# Altium PCB PCB1.PcbDoc
Units mm, origin at the board's own origin, x right, y up, seen from the top; angles counter-clockwise.
Board outline 18.75 x 45.47 mm, 4 copper layers (Top Layer, signal 1, signal2, Bottom Layer), stack 0.603 mm thick; 25 components, 40 nets, 147 pads, 32 vias.
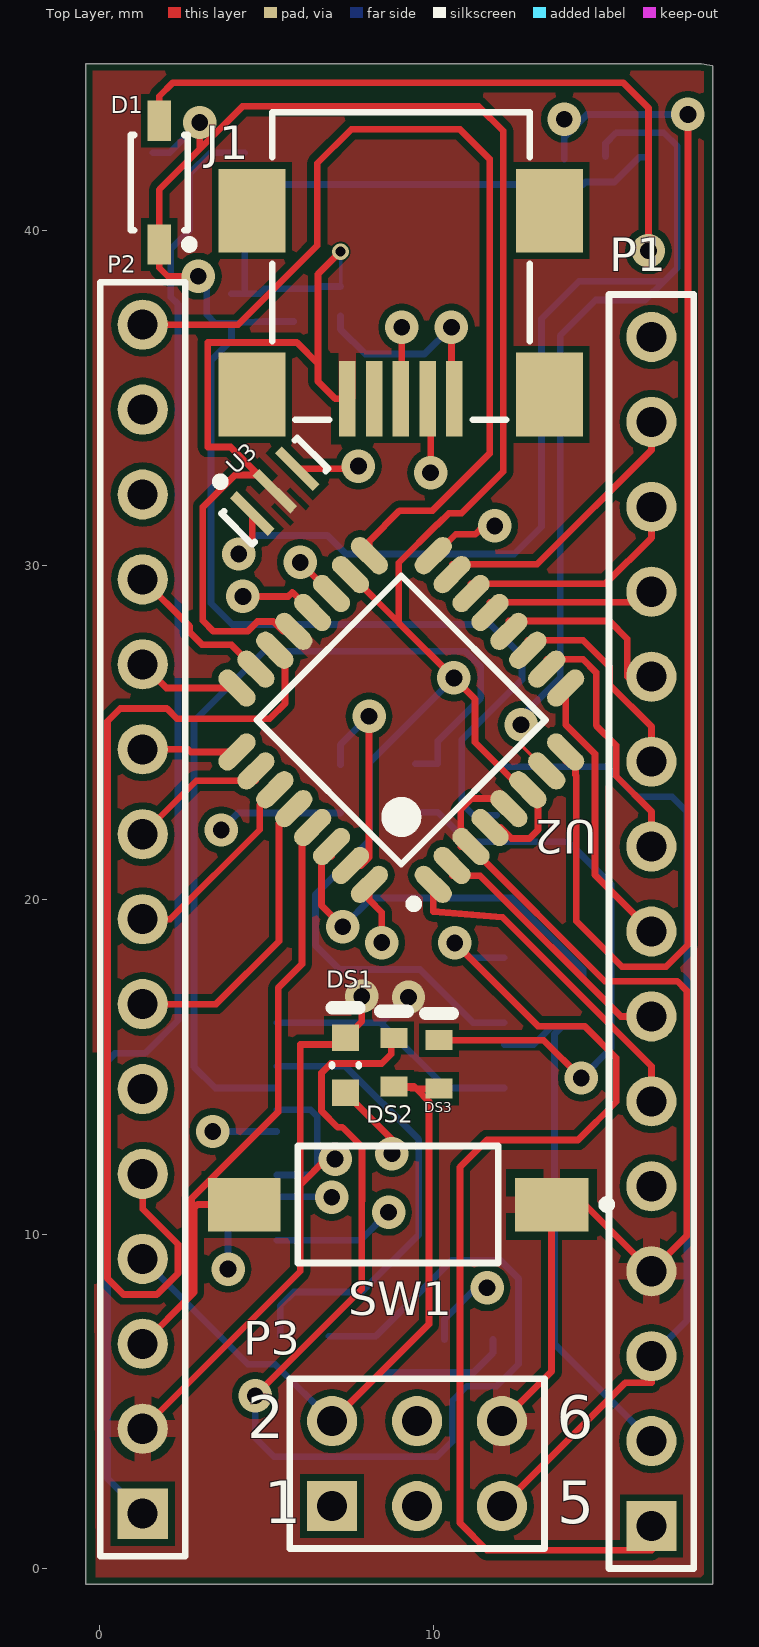
[diagram p0: Top Layer view]
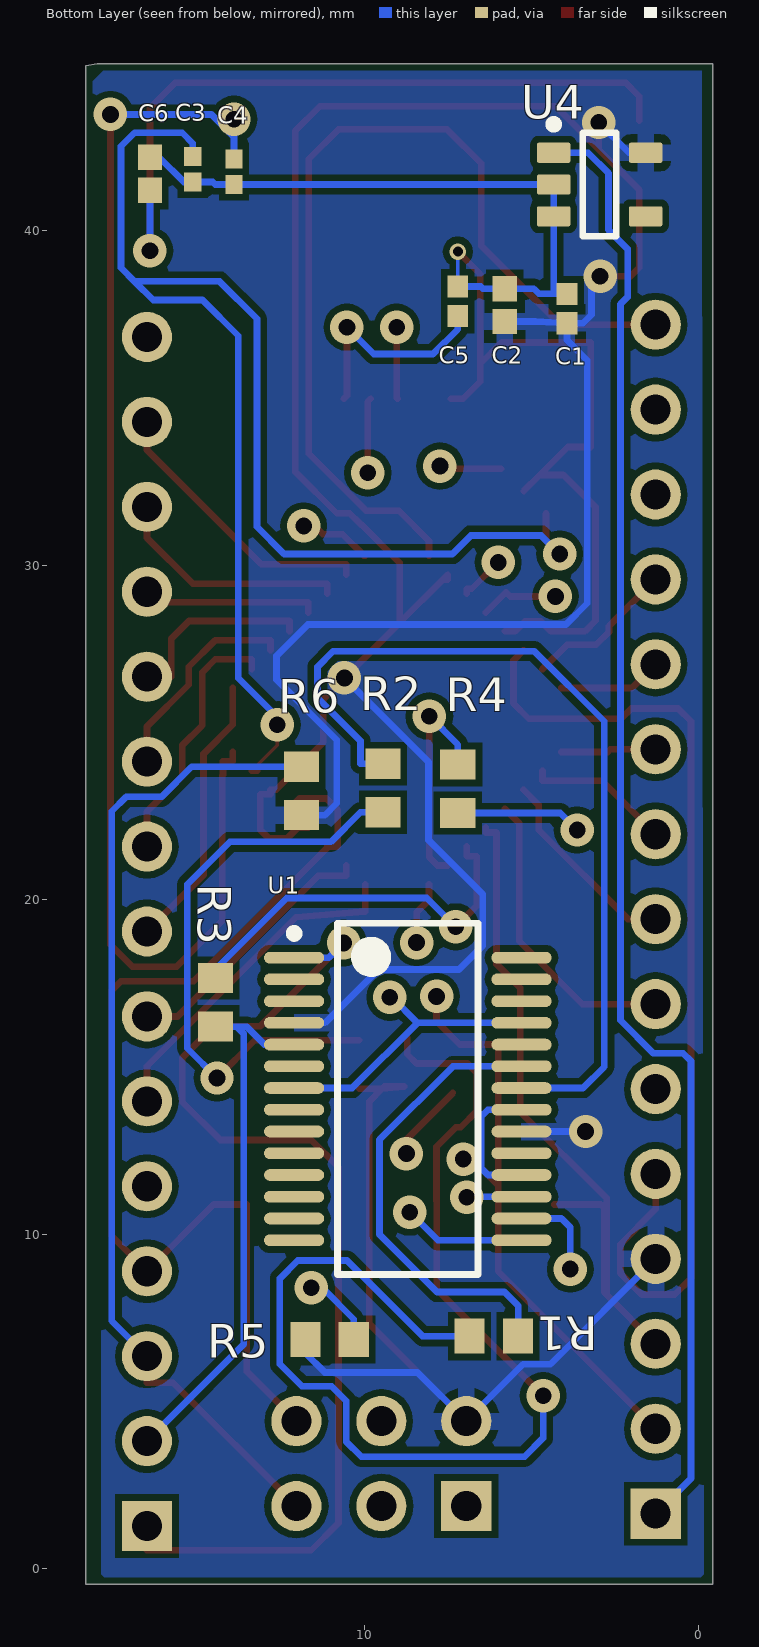
[diagram p1: Bottom Layer view, seen from below]
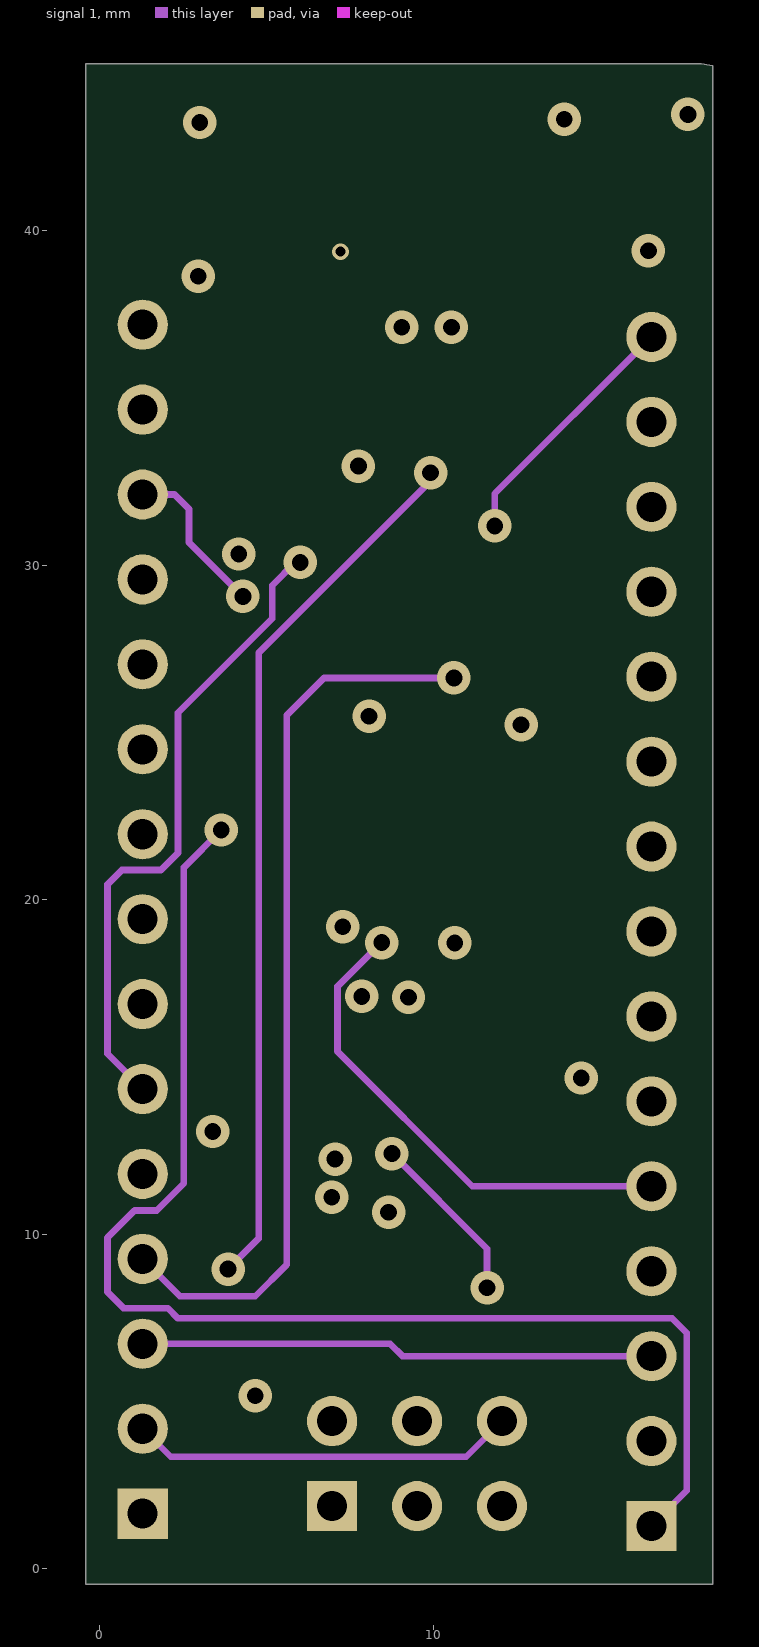
[diagram p2: signal 1]
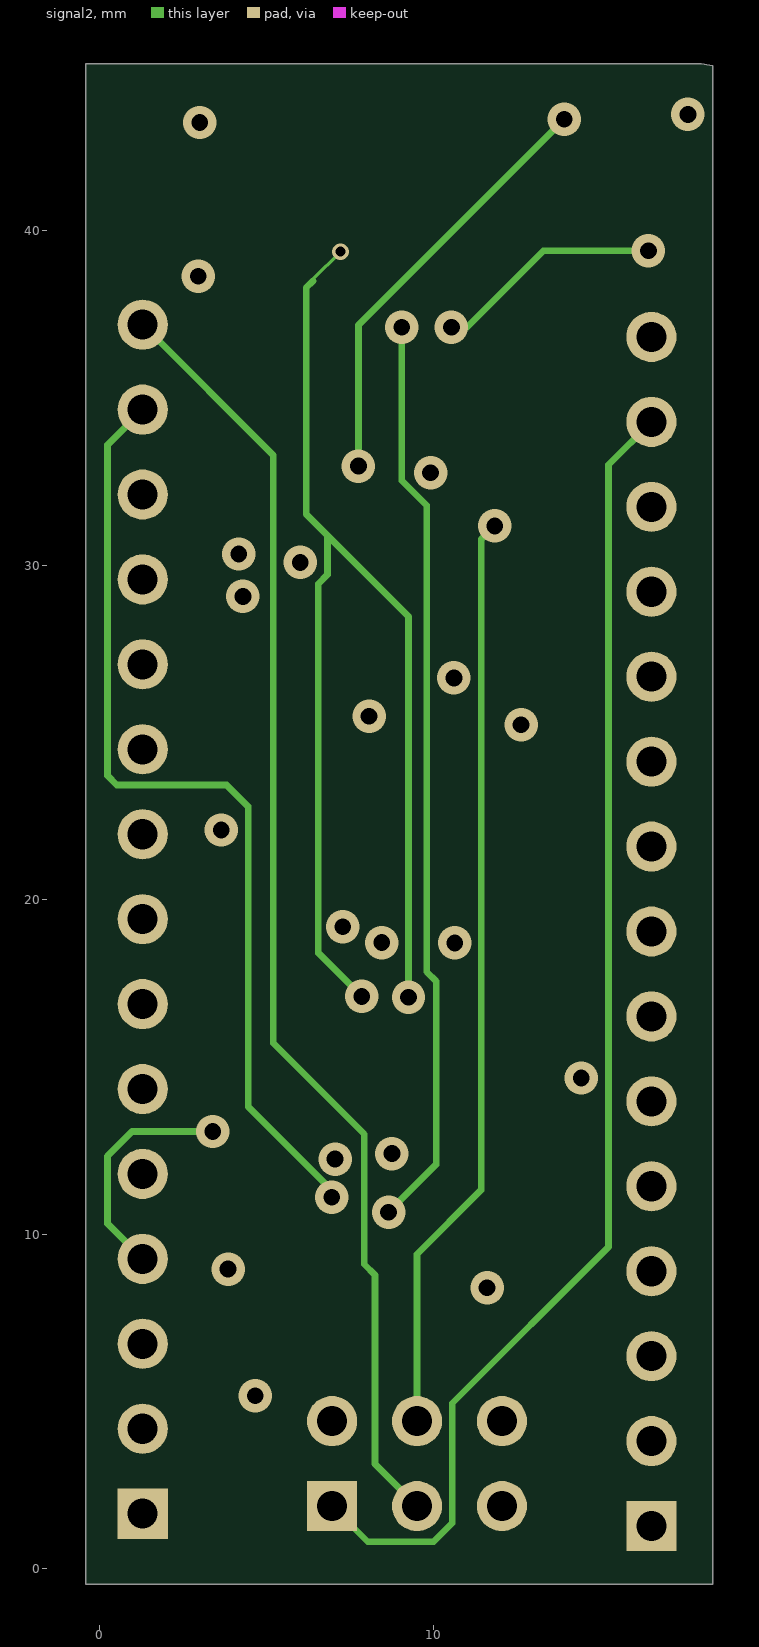
[diagram p3: signal2]

## Layer stack, top to bottom
Top Solder: solder mask 0.0102, Solder Resist, Dk 3.5
Top Layer: signal copper 0.0356
Dielectric 2: prepreg 0.0711, FR-4, Dk 4.1
signal 1: signal copper 0.035
Dielectric 1: dielectric 0.32, FR-4, Dk 4.8
signal2: signal copper 0.035
Dielectric 3: prepreg 0.0711, FR-4, Dk 4.1
Bottom Layer: signal copper 0.0356
Bottom Solder: solder mask 0.0102, Solder Resist, Dk 3.5

## Board outline
-0.406,-0.467 -0.406,45 18,45 18.339,44.938 18.339,-0.471

## Design rules (kind name [scope] priority, off if disabled: settings)
BoardOutlineClearance [All] p1: gap=0.2 ignorepadtopadclearanceinfootprint=FALSE except(0.4: Arc-SplitBarrior Arc-SplitContinuation Track-SplitBarrior Track-SplitContinuation SMDPad-SplitBarrior SMDPad-SplitContinuation THPad-SplitBarrior THPad-SplitContinuation Via-SplitBarrior Via-SplitContinuation Fill-SplitBarrior Fill-SplitContinuation Poly-SplitBarrior Poly-SplitContinuation Region-SplitBarrior Region-SplitContinuation Text-SplitBarrior Text-SplitContinuation)
Clearance "Clearance Bottom Layer" [OnLayer('Bottom Layer')] p1: gap=0.203 ignorepadtopadclearanceinfootprint=TRUE except(0.254: Arc-Text Track-Text SMDPad-Text THPad-Text Via-Text Fill-Text Poly-Text Region-Text Text-Text)
Clearance "Clearance Top Layer" [OnLayer('Top Layer')] p2: gap=0.203 ignorepadtopadclearanceinfootprint=TRUE except(0.254: Arc-Text Track-Text SMDPad-Text THPad-Text Via-Text Fill-Text Poly-Text Region-Text Text-Text)
Clearance [All] p3: gap=0.2 ignorepadtopadclearanceinfootprint=FALSE except(0.089: Arc-Arc Arc-Track Arc-SMDPad Track-Track Track-SMDPad SMDPad-SMDPad; 0.127: Arc-Via Track-Via SMDPad-Via THPad-Via Via-Via; 0.254: Arc-Text Track-Text SMDPad-Text THPad-Text Via-Text Fill-Text Poly-Text Region-Text Text-Text)
HoleSize [All] p1: absolutevalues=TRUE maxlimit=6.3 minlimit=0.2 maxpercent=80.000 minpercent=20.000
MinimumAnnularRing [All] p1: minimumring=0.1
MinimumSolderMaskSliver [All] p1: minsoldermaskwidth=0.1
PolygonConnect PolygonConnect_1 [All] p1: thpad.connectstyle=Relief thpad.reliefconductorwidth=0.508 thpad.reliefentries=4 thpad.polygonreliefangle="90 Angle" thpad.airgapwidth=0.254 smdpad.connectstyle=Relief smdpad.reliefconductorwidth=0.508 smdpad.reliefentries=4 smdpad.polygonreliefangle="90 Angle" smdpad.airgapwidth=0.254 via.connectstyle=Direct via.reliefconductorwidth=0.508 via.reliefentries=4 via.polygonreliefangle="90 Angle" via.airgapwidth=0.254
RoutingCorners [All] p1: cornerstyle=Round minsetback=2.54 maxsetback=2.54
RoutingVias [All] p1: holewidth=0.5 width=1 viastyle="Through Hole" minholewidth=0.2 minwidth=0.45 maxholewidth=1 maxwidth=2
SilkToSilkClearance [All] p1: silktosilkclearance=0.1
SilkToSolderMaskClearance [IsPad] p1: minsilkscreentomaskgap=0.1 clearancetoexposedcopper=TRUE
SolderMaskExpansion [All] p1: expansion=0.1
Width [All] p1: maxlimit=0.5 minlimit=0.1 preferedwidth=0.2 minimp=50.000000 maximp=50.000000 favimp=50.000000
25 further rules are at their usual default settings.

## Components (designator, comment, footprint, x,y, rotation, side; value= is the part's Value field where it differs from the comment)
C1 "4.7uF" CAPC1005X55X25NL05T10 3.95,37.681 r270 bottom
C2 "0.1uF" CAPC1005X55X25ML05T10 5.809,37.782 r270 bottom
C3 "18pF" CAPC1005X55X30LL05T10 15.138,41.846 r270 bottom
C4 "18pF" CAPC1005X55X30LL05T10 13.906,41.769 r270 bottom
C5 "4.7uF" CAPC1005X55X25NL05T10 7.214,37.9 r270 bottom
C6 "0.1uF" CAPC1005X55X25ML05T10 16.421,41.712 r270 bottom
D1 "1N5819HW-7-F" DIOD-SOD-123-2_V 1.791,41.448 r270 top
DS1 "APT1608SGC" KING-APT1608SGC_V 7.36,15.05 r90 top
DS2 "TLMS1000-GS08" VISH-TLMS1000_V 8.814,15.139 r90 top
DS3 "TLMS1000-GS08" VISH-TLMS1000_V 10.16,15.074 r90 top
J1 "651305142821" 651305142821 9.017,38.951 r180 top
P1 "Header 15" HDR1X15 16.51,1.27 r90 top
P2 "Header 15" HDR1X15 1.295,1.638 r90 top
P3 "Header 3X2" HDR2X3 6.96,1.867 r0 top
R1 "330" RESC1608X55X30ML15T15 6.134,6.947 r0 bottom
R2 "330" RESC1608X55X30ML15T15 9.449,23.342 r270 bottom
R3 "1k" RESC1608X55X30ML15T15 14.463,16.929 r270 bottom
R4 "1k" RESC1608X55X30ML15T15 7.214,23.316 r270 bottom
R5 "330" RESC1608X55X30ML15T15 11.049,6.845 r180 bottom
R6 "1k" RESC1608X55X30ML15T15 11.887,23.253 r270 bottom
SW1 "FSMSM" TECO-FSMSM-2_V 8.928,10.884 r180 top
U1 "FT232RL-Reel" SSOP-28_L 8.709,14.042 r180 bottom
U2 "ATmega328-AU" 32A_L 9.03,25.375 r135 top
U3 "CSTCE16M0V53-R0" MURA-CSTCE_V-3_V 5.245,32.22 r45 top
U4 "TPS76150DBVT" DBV0005A_N 2.972,41.389 r180 bottom

## Footprints (in the part's own frame and the unit in brackets; to place one, negate y for a bottom-side part, rotate by r counter-clockwise, add the part's x,y. Pads: shape width x height; smd on the part's side, far side on the other; paste and mask are expansions set on the pad)
32A_L [mm] "Thin QFP, 32-Leads, Body 7x7mm, Pitch 0.8mm, IPC High Density"
  oval 1.35x0.55 smd: 1(-4.15,2.8) 2(-4.15,2) 3(-4.15,1.2) 4(-4.15,0.4) 5(-4.15,-0.4) 6(-4.15,-1.2) 7(-4.15,-2) 8(-4.15,-2.8) 17(4.15,-2.8) 18(4.15,-2) 19(4.15,-1.2) 20(4.15,-0.4) 21(4.15,0.4) 22(4.15,1.2) 23(4.15,2) 24(4.15,2.8)
  oval 0.55x1.35 smd: 9(-2.8,-4.15) 10(-2,-4.15) 11(-1.2,-4.15) 12(-0.4,-4.15) 13(0.4,-4.15) 14(1.2,-4.15) 15(2,-4.15) 16(2.8,-4.15) 25(2.8,4.15) 26(2,4.15) 27(1.2,4.15) 28(0.4,4.15) 29(-0.4,4.15) 30(-1.2,4.15) 31(-2,4.15) 32(-2.8,4.15)
  silkscreen extent -4.27,-3.05 3.05,3.75, body extent -3.5,-3.5 3.5,3.5, height 1.2
651305142821 [mm] "Mini USB 2.0 Type AB SMT Horizontal 5 Contacts"
  rect 0.5x2.25 smd: 1(-1.6,3.965) 2(-0.8,3.965) 3(0,3.965) 4(0.8,3.965) 5(1.6,3.965)
  rect 2x2.5 smd: Shell(-4.45,3.84) Shell(-4.45,-1.66) Shell(4.45,3.84) Shell(4.45,-1.66)
  silkscreen extent -3.85,-4.6 3.85,4.6, body extent -4.95,-4.6 4.95,4.8, height 4.1
CAPC1005X55X25ML05T10 [mm] "Chip Capacitor, 2-Leads, Body 1.00x0.50mm, IPC Low Density"
  rect 0.76x0.72 smd: 1(-0.49,0) 2(0.49,0)
  body extent -0.53,-0.28 0.53,0.27, height 0.55
CAPC1005X55X25NL05T10 [mm] "Chip Capacitor, 2-Leads, Body 1.00x0.50mm, IPC Medium Density"
  rect 0.66x0.62 smd: 1(-0.44,0) 2(0.44,0)
  body extent -0.53,-0.28 0.53,0.27, height 0.55
CAPC1005X55X30LL05T10 [mm] "Chip Capacitor, 2-Leads, Body 1.00x0.50mm, IPC High Density"
  rect 0.56x0.52 smd: 1(-0.38,0) 2(0.38,0)
  body extent -0.53,-0.28 0.53,0.28, height 0.55
DBV0005A_N [mm] "SOT23, 5-Leads, Body 3.05x1.75mm, Pitch 0.95mm, IPC Medium Density"
  rrect17% 1x0.6 smd: 1(-1.375,0.95) 2(-1.375,0) 3(-1.375,-0.95) 4(1.375,-0.95) 5(1.375,0.95)
  silkscreen extent -1.5,-1.55 0.5,1.92, body extent -1.42,-1.46 1.42,1.46, height 1.08
DIOD-SOD-123-2_V [mm] "SOD-123, 2-Leads, Body 2.85x1.7mm (max), Pitch 3.7mm"
  rect 1.2x0.7 smd: 1(-1.85,0) 2(1.85,0)
  silkscreen extent -1.43,-0.85 1.97,1.03, body extent -1.42,-0.85 1.43,0.85, height 1.45
HDR1X15 [mm] "Connector; Header; 15 Position"
  rect 1.5x1.5 hole 0.9: 1(0,0)
  round 1.5 hole 0.9: 2(2.54,0) 3(5.08,0) 4(7.62,0) 5(10.16,0) 6(12.7,0) 7(15.24,0) 8(17.78,0) 9(20.32,0) 10(22.86,0) 11(25.4,0) 12(27.94,0) 13(30.48,0) 14(33.02,0) 15(35.56,0)
  silkscreen extent -1.27,-1.27 36.83,1.27
HDR2X3 [mm] "Connector; Header; 3x2 Position"
  rect 1.5x1.5 hole 0.9: 1(0,0)
  round 1.5 hole 0.9: 2(0,2.54) 3(2.54,0) 4(2.54,2.54) 5(5.08,0) 6(5.08,2.54)
  silkscreen extent -1.27,-1.27 6.35,3.81
KING-APT1608SGC_V [mm] "SMD, 2-Leads, Body 0.8x1.6mm"
  rect 0.8x0.8 smd: 1(-0.825,0) 2(0.825,0)
  silkscreen extent -0.02,-0.4 1.73,0.4, body extent -0.8,-0.4 0.81,0.4, height 0.76
MURA-CSTCE_V-3_V [mm] "SMD, 3-Leads, Body 3.2x1.3mm, Pitch 0.95mm"
  rect 0.3x1.6 smd: 1(-0.95,0) 2(0,0) 3(0.95,0)
  silkscreen extent -1.6,-0.65 1.6,1.47, body extent -1.6,-0.65 1.6,0.65, height 1
RESC1608X55X30ML15T15 [mm] "Chip Resistor, 2-Leads, Body 1.60x0.80mm, IPC Low Density"
  rect 0.9x1.05 smd: 1(-0.725,0) 2(0.725,0)
  body extent -0.87,-0.48 0.87,0.48, height 0.55
SSOP-28_L [mm] "SOP, 28-Leads, Body 10.2x5.3mm, Pitch 0.65mm, IPC High Density"
  oval 1.8x0.35 smd: 1(-3.4,4.225) 2(-3.4,3.575) 3(-3.4,2.925) 4(-3.4,2.275) 5(-3.4,1.625) 6(-3.4,0.975) 7(-3.4,0.325) 8(-3.4,-0.325) 9(-3.4,-0.975) 10(-3.4,-1.625) 11(-3.4,-2.275) 12(-3.4,-2.925) 13(-3.4,-3.575) 14(-3.4,-4.225) 15(3.4,-4.225) 16(3.4,-3.575) 17(3.4,-2.925) 18(3.4,-2.275) 19(3.4,-1.625) 20(3.4,-0.975) 21(3.4,-0.325) 22(3.4,0.325) 23(3.4,0.975) 24(3.4,1.625) 25(3.4,2.275) 26(3.4,2.925) 27(3.4,3.575) 28(3.4,4.225)
  silkscreen extent -3.52,-5.25 2.1,5.25, body extent -2.8,-5.25 2.8,5.25, height 2
TECO-FSMSM-2_V [mm] "SMD, 2-Leads, Body 6x3.5mm, Pitch 9.19mm"
  rect 2.2x1.6 smd: 1(-4.595,0)
  rect 2.18x1.6 smd: 2(4.595,0)
  silkscreen extent -6.37,-1.75 3,1.75, body extent -4.98,-1.75 4.98,1.75, height 4.4
VISH-TLMS1000_V [mm] "SMD, 2-Leads, Body 0.8x1.6mm"
  rect 0.6x0.8 smd: 1(-0.725,0) 2(0.725,0)
  silkscreen extent 1.52,-0.4 1.52,0.4, body extent -0.8,-0.4 0.8,0.4, height 0.65

## Part data
C1 C5: library part CMP-2008-04549-1, Manufacturer=Murata, Part Number=GRM155R60J475ME47D
C2 C6: library part CMP-2100-03641-1, "Chip Capacitor, 0.1 uF, +/- 10%, 16 V, -55 to 125 degC, 0402 (1005 Metric), RoHS, Tape and Reel", Capacitance=100nF, Case/Package=0402, Case Code (Metric)=1005, Dielectric=X7R, Dielectric Material=Ceramic, Insulation Resistance=10GR, Manufacturer=Murata, Max Operating Temperature=125degC, Min Operating Temperature=-55degC, Package Description="2-Pin Surface Mount Device, Body 1 x 0.5 mm", Package Quantity=1, Tolerance=10%, Voltage=16V, Case Code (Imperial)=0402, Datasheet URL=http://psearch.en.murata.com/capacitor/product/GRM155R71C104KA88%23.pdf, Datasheet Version=42675.0, Depth=0.5mm, Height=0.5mm, Lead Free=LeadFree, Length=1mm, Manufacturer URL=http://www.murata.com/, Material=Ceramic, Mount=SurfaceMount, Number of Pins=2, Package Reference=0402, Packaging=TapeandReel, Radiation Hardening=No, REACH SVHC=NoSVHC, RoHSCompliant=true, Termination=SMD/SMT, Thickness=0.022inch, Voltage Rating=16V, Voltage Rating (DC)=16V, Width=0.5mm
C3 C4: library part CMP-2008-03288-1, Manufacturer=Kemet, Part Number=C0402C180J5GACTU
D1: library part CMP-0303-00003-1, "1.0 A Surface Mount Schottky Barrier Rectifier, 40 V, -65 to 125 degC, 2-Pin SOD-123 Package, RoHS, Tape and Reel", @ Terminal Temperature TT (degC)=90, Forward Voltage Drop VF (V)=0.45, Manufacturer="Diodes Inc", Maximum Average Rectified Current IO (A)=1, Maximum Reverse Current IR (uA)=50, Operating and Storage Temperature Range="-65 to 125 degC", Peak Forward Surge Current IFSM (A)=25, Peak Repetitive Reverse Voltage VRRM (V)=40, @ IF (A)=1, @ VR (V)=40, ComponentLink1Description="Manufacturer URL", ComponentLink1URL=http://www.diodes.com/, ComponentLink2Description=Datasheet, ComponentLink2URL=http://www.diodes.com/datasheets/ds30217.pdf, DatasheetVersion="Rev. 15-2", Mounting Technology="Surface Mount", PackageDescription="2-Pin SOD-123, Body 2.7 x 1.55 mm, Pitch 3.7 mm", PackageReference=SOD-123-2, Packing="Tape and Reel", PartNumber=1N5819HW-7-F, RoHS=TRUE, Total Capacitance CT (pF)=50, VR (RMS) (V)=28
DS1: library part CMP-2000-05789-1, "Super Bright Green LED, 62.5 mW, 25 mA, -40 to 85 degC, 2-Pin SMD, RoHS, Tape and Reel", Color=Green, Current - Test=20mA, Manufacturer=Kingbright, Millicandela Rating=15mcd, Package / Case=0603(1608Metric), Package Description="2-Pin Surface Mount Device, Body 0.8 x 1.6 mm", Standard Package=2,000, Voltage - Forward (Vf) (Typ)=2.2V, 3D Model="APT1608x.sldprt /  / APT1608x.pro /  / APT1608x.igs /  / APT1608x.stp", Catalog Drawings="APT1608SeriesTop /  / APT1608SeriesSide", Category=Optoelectronics, Datasheet URL=https://datasheet.ciiva.com/2113/apt1608sgc-2113808.pdf, Datasheet Version="Rev. 16B, 02/2012", Family=LEDIndication-Discrete, Height=0.75mm, Lens Style/Size=RectanglewithFlatTop,1.2mmx0.8mm, Lens Type=Clear, Manufacturer URL=http://www.kingbright.com/, Mounting Technology=SurfaceMount, Mounting Type=SurfaceMount, Online Catalog=0603RectanglewithFlatTopChipLEDs, Other Names=754-1121-2, Package Reference=APT1608SGC, Packaging=Tape&Reel(TR), Size / Dimension=1.60mmLx0.80mmW, Viewing Angle=120°, Wavelength - Dominant=568nm, Wavelength - Peak=565nm
DS2 DS3: library part CMP-2000-07254-1, "Low Current LED, 40 mW, 1.8 V, -40 to 100 degC, 2-Pin SMD (0603), RoHS, Tape and Reel", Forward Current If=2mA, Forward Voltage=1.8V, LED Colour=Red, Manufacturer=Vishay, Package Description="2-Pin Surface Mount Device, Body 1.6 x 0.8 mm", Package Reference=TLMS1000, Automotive Qualification Standard=AEC-Q100, Bulb Size=1.6mmx0.8mm, Datasheet URL=https://datasheet.ciiva.com/5798/1698881-5798337.pdf, Datasheet Version="Rev. 1.7, 02/2011", LED Mounting=SMD, Lens Shape=Rectangular, Luminous Intensity=4mcd, Manufacturer URL=http://www.vishay.com/, Mounting Technology=SurfaceMount, MSL=MSL2-1year, Packaging=CutTape, Product Range=-, SVHC=ToBeAdvised, Viewing Angle=80°, Wavelength Typ=636nm
J1: library part CMP-1502-03247-1, "Mini USB 2.0 Type AB Receptacle WR-COM, Horizontal, SMT, with Pads", Contact Resistance=20mOhm, Manufacturer="Wurth Elektronik", Operating Temperature=-40to105degC, Rated Current=1A, Working Voltage=30VAC, Connector Type=MiniUSB2.0TypeAB, Datasheet URL=https://katalog.we-online.de/em/datasheet/651305142821.pdf, Gender=Receptacle, Manufacturer URL=http://www.we-online.de, Mounting Technology=SMT, Orientation=Horizontal, Package Reference=651305142821, Packaging=TapeandReel, Part Number=651305142821, Publisher=WurthElektronik
P1 P2: "Header, 15-Pin", LatestRevisionDate=17-Jul-2002, LatestRevisionNote="Re-released for DXP Platform.", Publisher="Altium Limited"
P3: "Header, 3-Pin, Dual row", LatestRevisionDate=17-Jul-2002, LatestRevisionNote="Re-released for DXP Platform.", Publisher="Altium Limited"
R1 R2 R3 R4 R5 R6: library part CMP-2000-00772-1, Manufacturer=Panasonic, Part Number=ERJ-3GEYJ331V
SW1: library part CMP-2000-07511-1, "FSMSM Push Button Switch, 50 mA, -35 to 85 degC, 2-Pin SMD, RoHS, Bulk", Case\/Package=SMD/SMT, Contact Current Rating=50mA, Contact Resistance=100mOhm, Manufacturer="TE Connectivity", Max Operating Temperature=85degC, Max Voltage Rating (DC)=12V, Min Operating Temperature=-35degC, Operating Force=180gf, Package Description="2-Pin Surface Mount Device, Body 6 x 3.5 mm, Pitch 9.19 mm", Package Quantity=1000, Voltage Rating (DC)=24V, Actuator Length=1.07mm, Actuator Material=Polyamide, Contact Material=Brass, Contact Plating=Silver, Current Rating=50mA, Datasheet URL=http://www.te.com/commerce/DocumentDelivery/DDEController?Action=showdoc&DocId=Customer+Drawing%7F1437566-3%7FC2%7Fpdf%7FEnglish%7FENG_CD_1437566-3_C2_1437566_3_1_c.dwg.pdf%7F1437566-3, Datasheet Version="Rev. C2, 08/2014", Electrical Life=20000Cycles, ELV=Compliant, Illumination Type=Illuminated, Lead Free=LeadFree, Manufacturer URL=http://www.te.com/, Mechanical Life=20000Cycles, Mount=SurfaceMount, Mounting Technology=SurfaceMount, Orientation=Straight, Package Reference=FSMSM, Packaging=LoosePiece, REACH SVHC=Unknown, RoHSCompliant=true, Switch Travel=0.25mm, Termination=GullWing, Throw Configuration=SPST
U1: library part CMP-0078-00029-3, "USB UART Asynchronous Serial Data Transfer Chip, 28-pin SSOP, Tape and Reel", Manufacturer=FTDI, ComponentLink1Description="Manufacturer URL", ComponentLink1URL=http://www.ftdichip.com/, ComponentLink2Description=Datasheet, ComponentLink2URL=http://www.ftdichip.com/Support/Documents/DataSheets/ICs/DS_FT232R.pdf, DatasheetVersion="ver 2.10, Mar-2012", PackageDescription="28-Pin Small Outline Package 0.65 mm Pitch", PackageReference=SSOP-28, PackageVersion=Mar-12, PartNumber=FT232RL-Reel, RevisionNote="DatasheetVersion updated to 2.10 Mar-2012"
U2: library part CMP-0095-00261-2, "8-bit AVR Microcontroller, 32KB Flash, 1KB EEPROM, 2KB SRAM, 32-pin TQFP, Industrial Grade (-40°C to 85°C)", Code_JEDEC=MS-026-ABA, ComponentLink1Description="Manufacturer URL", ComponentLink1URL=http://www.atmel.com/, ComponentLink2Description="ATmega48A/48PA/88A/88PA/168A/168PA/328/328P Datasheet", ComponentLink2URL=http://www.atmel.com/dyn/resources/prod_documents/doc8271.pdf, ComponentLink3Description="ATmega48A/48PA/88A/88PA/168A/168PA/328/328P Summary", ComponentLink3URL=http://www.atmel.com/dyn/resources/prod_documents/8271S.pdf, DatasheetVersion="revD, May-2011", PackageDescription="32-Lead, 7x7x1.0 mm Body, 0.8mm Lead Pitch, Thin Profile Plastic Quad Flat Package (TQFP)", PackageReference=32A, PackageVersion="revC, Oct-2010", RevisionNote="DatasheetVersion & PackageVersion updated. URLs added."
U3: library part CMP-0588-00001-2, "Ceramic Resonator, 16 MHz with Built-in Capacitance, Thickness Expander Mode, Initial Frequency Tolerance +/- 0.5%, Load Capacity 15 pF, -20 to 80 degC, 3.2 x 1.3 x 1 mm SMD, RoHS, Reel", Initial Frequency Tolerance="+/- 0.5%", Load Capacity="15 pF", Manufacturer=Murata, Operating Temperature Range="-20 to 80 degC", Oscillating Frequency="16 MHz", ComponentLink1Description="Manufacturer URL", ComponentLink1URL=http://www.murata.com/, ComponentLink2Description=Datasheet, ComponentLink2URL=http://www.murata.com/products/catalog/pdf/p16e.pdf, DatasheetVersion="Rev. P16E-22", Initial Tolerance="+/- 0.5%", Mounting Technology="Surface Mount", PackageDescription="3-Pin SMD, Body 3.2 x 1.3 mm, Pitch 0.95 mm", PackageReference=CSTCE_V-3, Packing=Reel, PartNumber=CSTCE16M0V53-R0, RoHS=TRUE
U4: library part CMP-0394-00728-2, "Single Output LDO, 100 mA, Fixed 5 V Output, 5.38 to 16 V Input, with Low IQ, 5-pin SOT-23 (DBV), -40 to 125 degC, Green (RoHS & no Sb/Br)", Manufacturer="Texas Instruments", Accuracy(%)=2, Code_JEDEC=MO-178, ComponentLink1Description="Manufacturer URL", ComponentLink1URL=http://www.ti.com/, ComponentLink2Description=Datasheet, ComponentLink2URL=http://www.ti.com/general/docs/lit/getliterature.tsp?genericPartNumber=TPS76150&fileType=pdf, ComponentLink3Description="Package Specification", ComponentLink3URL=http://www.ti.com/litv/pdf/mpds018i, DatasheetVersion=SLVS178B, Eco-Plan="Green (RoHS & no Sb/Br)", Fixed Output Options(V)=5, Iout(Max)(A)=0.1, Iq(Typ)(mA)=2.6, Mounting Technology="Surface Mount", PackageDescription="5-Pin Plastic Small Outline, Body 1.60 Ã— 2.90 mm, Pitch 0.95 mm", PackageReference=DBV0005A, PackageVersion=4073253-4/K, PartNumber=TPS76150DBVT, SubFamily="Single Channel LDO", Vdo(Typ)(mV)=170, Vin(Max)(V)=16, Vin(Min)(V)=5.38, Vout Adj(Max)(V)=5, Vout Adj(Min)(V)=5

## Via types
v1: diameter 1, hole 0.5, Top Layer to Bottom Layer, 31 vias
v2: diameter 0.5, hole 0.3, Top Layer to Bottom Layer, 1 vias

## Nets (pads, with @x,y where several pads share a name; then routed paths per layer and width w, separated by ;. In a path a pad name is that pad's centre, name@x,y a point inside that pad or via, vN(x,y) a via of type N, cw(c..) or ccw(c..) an arc to the next point about the centre after c; other vN are vias at no path point)
3.3V: P2.14 U1.17 | length 30.3
  signal2 w0.2: P2.14 0.241,33.604 0.241,23.711 0.521,23.431 3.807,23.431 4.448,22.79 4.448,13.815 6.947,11.316 v1(6.947,11.1)
  Bottom Layer w0.2: U1.17 6.929,11.117 v1(6.947,11.1)
+5: C1.2 C2.2 D1.2 DS2.1 DS3.1 P2.4 P3.2 R5.1 R6.2 U1.4 U1.20 U2.4 U2.6 U2.18 U4.5 | length 158.6
  Top Layer w0.2: v1(2.959,38.646) 2.045,38.646 1.791,38.9 D1.2 1.791,41.237 3,42.446 ; v1(3,43.243) 3,42.446 ; P3.2 9.858,7.305 9.858,13.967 9.476,14.349 ; DS3.1 9.476,14.349 ; v1(10.604,26.632) 8.954,28.283 ; U2.4 11.995,22.157 12.321,21.831 12.865,21.831 13.119,22.085 13.119,23.152 12.813,23.152 U2.6 12.652,23.289 11.233,24.708 11.233,26 8.954,28.279 8.954,28.283 ; 3,42.446 4.28,43.726 11.341,43.726 12.078,42.989 12.078,32.804 10.833,31.559 10.454,31.559 10.127,31.233 10.11,31.233 8.954,30.076 8.954,28.283 ; U2.18@7.655,29.578 8.954,28.283 ; U2.18@7.655,29.578 U2.18 7.509,29.578 U2.18@7.655,29.578 ; U2.18@7.655,29.578 7.658,29.578 8.954,28.283 ; 9.476,14.349 9.411,14.414 DS2.1 9.476,14.349
  signal 1 w0.2: P2.4 2.413,8.141 4.661,8.141 5.601,9.08 5.601,25.514 6.718,26.632 v1(10.604,26.632)
  signal2 w0.2: P2.4 0.241,10.312 0.241,12.332 0.978,13.068 v1(3.391,13.068)
  Bottom Layer w0.2: P2.4 4.445,6.109 5.258,6.109 P3.2 8.416,5.863 11.189,5.863 11.774,6.449 R5.1 ; U4.5 2.095,42.339 v1(3,43.243) ; v1(2.959,38.646) 3.213,38.392 3.213,37.495 3.467,37.241 C1.2 ; v1(3.391,13.068) v1(3.391,13.068) U1.20 ; C2.2 4.89,37.292 C1.2 ; v1(10.604,26.632) 8.09,24.117 8.09,21.78 6.464,20.155 6.464,18.631 7.179,17.916 9.59,17.916 11.189,16.317 U1.4 ; R6.2 11.189,22.528 10.833,22.883 10.833,24.778 12.636,26.581 12.636,27.292 11.697,28.232 3.975,28.232 3.34,28.867 3.34,36.131 3.95,36.741 C1.2
ADC0: P2.12 U2.23 | length 4.6
  Top Layer w0.2: P2.12 2.693,28.181 2.693,28.008 3.071,27.629 3.24,27.629 3.246,27.623 3.953,27.623 U2.23
ADC1: P2.11 U2.24 | length 3.1
  Top Layer w0.2: P2.11 2.004,26.329 U2.24
ADC2: P2.10 U2.25 | length 2.9
  Top Layer w0.2: P2.10 2.654,24.498 2.733,24.42 U2.25
ADC3: P2.9 U2.26 | length 4.3
  Top Layer w0.2: P2.9 2.896,23.558 4.681,23.558 U2.26
ADC4: P2.8 U2.27 | length 6
  Top Layer w0.2: P2.8 2.121,19.418 4.795,22.092 4.795,22.836 U2.27
ADC5: P2.7 U2.28 | length 9
  Top Layer w0.2: P2.7 3.492,16.878 5.372,18.758 5.372,22.283 U2.28
ADC6: P2.6 U2.19 | length 20.8
  Top Layer w0.2: v1(6.007,30.086) 6.794,29.299 6.944,29.299 U2.19
  signal 1 w0.2: P2.6 0.241,15.392 0.241,20.46 0.673,20.892 1.841,20.892 2.349,21.399 2.349,25.59 5.169,28.41 5.169,29.4 5.855,30.086 v1(6.007,30.086)
ADC7: P2.5 U2.22 | length 30.1
  Top Layer w0.2: P2.5 1.295,10.748 2.349,9.695 2.349,8.822 1.718,8.191 0.724,8.191 0.241,8.674 0.241,25.336 0.622,25.717 2.019,25.717 2.324,25.413 5.093,25.413 5.55,25.87 5.55,27.157 U2.22
AREF: P2.13 U2.20 | length 7.2
  Top Layer w0.2: v1(4.293,29.07) 5.646,29.07 5.773,29.197 U2.20
  signal 1 w0.2: P2.13 2.248,32.118 2.68,31.686 2.68,30.683 v1(4.293,29.07)
D2: P1.5 U2.32 | length 16.8
  Top Layer w0.2: U2.32 8.075,19.993 8.445,19.623 v1(8.445,18.719)
  signal 1 w0.2: v1(8.445,18.719) 8.433,18.719 7.122,17.408 7.122,15.459 11.151,11.43 P1.5
D3: P1.6 U2.1 | length 10.2
  Top Layer w0.2: U2.1 9.984,19.647 12.054,19.477 16.51,15.02 P1.6
D4: P1.7 U2.2 | length 8
  Top Layer w0.2: U2.2 10.55,20.714 11.392,20.714 15.596,16.51 P1.7
D5: P1.8 U2.9 | length 8.3
  Top Layer w0.2: U2.9 13.944,25.238 14.821,24.361 14.821,20.739 P1.8
D6: P1.9 U2.10 | length 7.8
  Top Layer w0.2: U2.10 13.378,27.191 14.466,27.191 14.857,26.8 14.857,25.214 15.457,24.613 15.457,23.694 16.51,22.64 P1.9
D7: P1.10 U2.11 | length 6.4
  Top Layer w0.2: U2.11 12.813,27.756 14.471,27.756 15.26,26.967 15.26,26.429 16.51,25.178 P1.10
D8: P1.11 U2.12 | length 5.9
  Top Layer w0.2: U2.12 12.247,28.334 15.253,28.334 15.786,27.8 15.786,26.67 P1.11
D9: P1.12 U2.13 | length 5.3
  Top Layer w0.2: U2.13 11.681,28.892 16.192,28.892 P1.12
D10: P1.13 U2.14 | length 7.2
  Top Layer w0.2: U2.14 11.116,29.453 15.14,29.453 16.51,30.823 P1.13
D11/MOSI: P1.14 P3.1 U2.15 | length 48.2
  Top Layer w0.2: U2.15 10.55,30.035 13.094,30.035 16.51,33.452 P1.14
  signal2 w0.2: P3.1 8.026,0.8 9.995,0.8 10.554,1.359 10.554,4.94 15.227,9.614 15.227,33.007 P1.14
D12/MISO: P1.15 P3.4 U2.16 | length 37.5
  Top Layer w0.2: U2.16 10.016,30.289 10.658,30.931 11.245,30.931 11.493,31.178 v1(11.824,31.178)
  signal 1 w0.2: v1(11.824,31.178) 11.824,32.144 P1.15
  signal2 w0.2: P3.4 9.5,9.398 11.417,11.316 11.417,30.772 v1(11.824,31.178)
D13/SCK: P2.15 P3.3 U2.17 | length 67.3
  Top Layer w0.2: P2.15 4.153,37.198 6.515,39.56 6.515,42.024 7.531,43.04 10.782,43.04 11.671,42.151 11.671,33.347 9.96,31.636 8.979,31.636 8.075,30.732 U2.17
  signal2 w0.2: P2.15 5.204,33.29 5.204,15.706 7.922,12.989 7.922,9.096 8.242,8.776 8.242,3.124 P3.3
D+: J1.3 U1.15 | length 33.3
  Top Layer w0.2: J1.3 9.042,35.011 v1(9.042,37.122)
  signal2 w0.2: v1(8.649,10.655) 10.071,12.078 10.071,17.564 9.792,17.843 9.792,31.788 9.042,32.537 v1(9.042,37.122)
  Bottom Layer w0.2: U1.15 7.81,9.817 v1(8.649,10.655)
D-: J1.2 U1.16 | length 31.4
  Top Layer w0.2: J1.2 9.906,34.897 v1(9.906,32.766)
  signal 1 w0.2: v1(3.848,8.954) 4.763,9.868 4.763,27.384 9.906,32.527 v1(9.906,32.766)
  Bottom Layer w0.2: v1(3.848,8.954) 3.848,10.198 4.117,10.467 U1.16
GND: C1.1 C2.1 C3.2 C4.2 C5.1 C6.1 DS1.2 J1.5 P1.4 P2.2 P3.6 SW1.1 U1.7 U1.18 U1.21 U1.25 U2.3 U2.5 U2.21 U3.2 U4.2 U4.3 | length 155.4
  Top Layer w0.2: P2.2 6.007,8.89 6.007,11.468 ; U3.2 U3.2@4.763,32.703 ; U2.21 5.499,28.026 5.203,28.322 4.724,28.322 4.429,28.026 3.413,28.026 3.096,28.343 3.096,31.747 4.051,32.703 U3.2@4.763,32.703 ; v1(7.048,12.243) 6.782,12.243 6.007,11.468 ; v2(7.214,39.383) 6.54,38.71 6.54,36.03 ; J1.5 7.051,34.986 6.54,35.496 6.54,36.03 ; v1(7.849,17.107) 7.849,16.364 7.156,15.671 6.007,15.671 6.007,11.468 ; P3.6 13.523,5.89 SW1.1 14.516,10.884 P1.4 17.564,9.944 17.564,17.284 17.285,17.563 15.113,17.563 11.116,21.56 U2.3 10.808,21.592 10.808,22.695 11.138,23.025 11.945,23.025 U2.5 ; U3.2@4.763,32.703 3.924,33.541 3.238,33.541 3.238,36.665 5.905,36.665 6.54,36.03
  signal 1 w0.2: P2.2 2.134,3.34 10.973,3.34 P3.6
  signal2 w0.1: 6.388,38.506 6.388,38.557 v2(7.214,39.383)
  signal2 w0.2: 6.388,38.506 6.185,38.303 6.185,31.531 6.822,30.894 ; v1(7.849,17.107) 6.55,18.405 6.55,29.45 6.822,29.721 6.822,30.894 ; v1(9.246,17.081) 9.246,28.47 6.822,30.894
  Bottom Layer w0.1: C5.1 v2(7.214,39.383)
  Bottom Layer w0.2: C1.1 4.346,38.121 4.788,38.121 4.94,38.273 C2.1 6.464,38.273 6.531,38.34 C5.1 ; 4.347,38.121 U4.3 U4.2 C4.2 14.465,41.389 14.543,41.467 C3.2 15.405,41.467 16.141,42.202 C6.1 ; U1.18 6.306,11.767 6.515,11.976 ; U1.21 6.312,13.717 6.515,13.514 6.515,11.976 ; U1.25 8.422,16.317 ; v1(7.048,12.243) 6.782,12.243 6.515,11.976 ; v1(9.246,17.081) 9.187,17.081 8.422,16.317 ; U1.7 10.372,14.367 8.422,16.317
NetDS1_1: DS1.1 R5.2 | length 9.9
  Top Layer w0.2: DS1.1 8.75,12.834 v1(8.75,12.408)
  signal 1 w0.2: v1(8.75,12.408) 11.595,9.563 v1(11.595,8.395)
  Bottom Layer w0.2: R5.2 10.324,7.455 11.264,8.395 v1(11.595,8.395)
NetDS2_2: DS2.2 R1.2 | length 35.1
  Top Layer w0.2: v1(4.661,5.169) 7.845,8.353 7.845,10.988 7.852,10.994 7.852,12.611 7.266,13.197 7.125,13.197 6.642,13.679 6.642,14.821 6.921,15.1 8.445,15.1 8.725,15.38 8.725,15.864 DS2.2
  Bottom Layer w0.2: v1(4.661,5.169) 4.661,3.899 5.22,3.34 10.096,3.34 10.554,3.797 10.554,5.016 10.986,5.448 11.874,5.448 12.535,6.109 12.535,8.674 12.002,9.207 10.528,9.207 8.268,6.947 R1.2
NetDS3_2: DS3.2 R2.2 | length 17.6
  Top Layer w0.2: DS3.2 13.284,15.799 v1(14.414,14.668)
  Bottom Layer w0.2: R2.2 10.124,22.617 11.011,21.73 14.034,21.73 15.303,20.46 15.303,15.557 v1(14.414,14.668)
NetR1_1: R1.1 U1.23 | length 13.9
  Bottom Layer w0.2: U1.23 7.36,15.017 9.553,12.824 9.553,9.985 7.836,8.268 5.815,8.268 5.409,7.861 R1.1
NetR2_1: R2.1 U1.22 | length 26.8
  Bottom Layer w0.2: U1.22 3.467,14.367 2.832,15.002 2.832,25.336 4.931,27.435 10.937,27.435 11.408,26.965 11.408,26.038 10.122,24.752 10.122,24.066 R2.1
NetR3_1: R3.1 U2.30 | length 11.7
  Top Layer w0.2: U2.30 6.944,21.298 6.642,21.298 6.642,19.825 v1(7.277,19.19)
  Bottom Layer w0.2: v1(7.277,19.19) 8.141,20.053 12.329,20.053 14.463,17.92 R3.1
NetR4_1: R4.1 U2.31 | length 6.7
  Top Layer w0.2: U2.31 7.823,21.026 8.064,21.267 v1(8.064,25.489)
  Bottom Layer w0.2: R4.1 7.214,24.638 v1(8.064,25.489)
RESET: P1.3 P2.3 P3.5 R6.1 SW1.2 U2.29 | length 67
  Top Layer w0.2: P2.3 2.756,8.179 ; SW1.2 2.934,10.884 2.834,10.785 2.834,8.257 2.756,8.179 ; U2.29 6.378,22.009 6.058,22.009 6.058,18.072 5.347,17.361 5.347,13.652 2.756,11.062 2.756,8.179 ; P3.5 15.723,5.55 16.51,5.55 P1.3
  signal 1 w0.2: P2.3 8.7,6.718 9.068,6.35 P1.3
  Bottom Layer w0.2: R6.1 15.173,23.978 16.074,23.077 17.131,23.077 17.564,22.644 17.564,7.404 P1.3
RX: P1.2 R3.2 U1.5 | length 16.3
  Bottom Layer w0.2: U1.5 12.992,15.667 13.529,16.204 13.83,16.204 ; R3.2 13.83,16.204 ; P1.2 13.611,6.709 13.611,15.985 13.83,16.204
TX: P1.1 R4.2 U1.1 | length 75.6
  Top Layer w0.2: v1(10.63,18.707) 13.119,16.218 14.506,16.218 15.457,15.267 15.457,13.957 14.314,12.814 11.595,12.814 10.782,12.002 10.782,1.359 11.595,0.546 16.51,0.546 P1.1
  signal 1 w0.2: v1(3.645,22.085) 2.527,20.968 2.527,11.519 1.714,10.706 1.054,10.706 0.241,9.893 0.241,8.268 0.724,7.785 2.045,7.785 2.349,7.48 17.132,7.48 17.564,7.048 17.564,2.324 P1.1
  Bottom Layer w0.2: v1(3.645,22.085) 4.151,22.591 R4.2 ; v1(10.63,18.707) 11.07,18.267 U1.1
VBUS: C5.2 C6.2 D1.1 J1.1 | length 35.3
  Top Layer w0.2: D1.1 1.791,44.031 2.197,44.437 15.659,44.437 16.421,43.675 v1(16.421,39.408) ; v1(10.528,37.122) 10.528,35.075 J1.1
  signal2 w0.2: v1(10.528,37.122) 10.998,37.122 13.284,39.408 v1(16.421,39.408)
  Bottom Layer w0.2: C5.2 7.214,37.059 7.953,36.319 9.725,36.319 v1(10.528,37.122) ; v1(16.421,39.408) C6.2
VCC: P2.1 U4.1 | length 44.1
  Bottom Layer w0.2: P2.1 0.241,2.692 0.241,15.176 0.47,15.405 1.359,15.405 2.349,16.396 2.349,37.811 2.133,38.027 2.133,39.461 2.705,40.033 2.705,41.73 3.315,42.339 U4.1
XTAL1: C3.1 U2.7 U3.1 | length 46.4
  Top Layer w0.1: v1(12.611,25.235) 12.611,24.622 U2.7
  Top Layer w0.2: v1(4.167,30.34) 4.573,30.747 U3.1 ; U2.7@13.221,23.854 U2.7
  Bottom Layer w0.2: v1(4.167,30.34) 4.721,30.894 6.822,30.894 7.375,30.34 12.408,30.34 13.221,31.153 13.221,37.376 14.338,38.494 16.878,38.494 ; v1(12.611,25.235) 12.611,25.463 13.779,26.632 13.779,36.868 14.846,37.935 16.319,37.935 16.878,38.494 ; C3.1 15.138,42.621 15.456,42.939 16.878,42.939 17.285,42.532 17.285,38.9 16.878,38.494
XTAL2: C4.1 U2.8 U3.3 | length 54.3
  Top Layer w0.2: U3.3 7.669,32.892 v1(7.747,32.969) ; U2.8 13.944,24.143 14.237,24.143 14.237,23.736 14.262,23.711 14.262,19.363 15.629,17.997 16.946,17.997 17.602,18.653 v1(17.602,43.485)
  signal2 w0.2: v1(7.747,32.969) 7.747,37.186 v1(13.906,43.345)
  Bottom Layer w0.2: C4.1 13.906,42.812 ; v1(13.906,43.345) 13.906,42.812 ; v1(17.602,43.485) 14.58,43.485 13.906,42.812
pads on no net: J1.4 J1.Shell U1.2 U1.3 U1.6 U1.8 U1.9 U1.10 U1.11 U1.12 U1.13 U1.14 U1.19 U1.24 U1.26 U1.27 U1.28 U4.4

## Polygon pours and split planes (outlines as drawn)
GND on Top Layer "GND" (solid, pour order 6): -0.368,44.78 -0.292,44.856 18.072,44.856 18.072,-0.368 18.034,-0.33 -0.102,-0.33
+5 on Bottom Layer "GND" (solid, remove dead copper, pour order 8): -0.076,44.856 17.755,44.856 19.063,43.548 17.882,42.367 17.882,-0.711 0.203,-0.711 -0.14,-0.368

## Silkscreen, mask and mechanical layers (free items; w line width, h text height)
Mechanical 1:
  lines w0.254: 0,0 0,45 18,45 ; 0.021,-0.004 18.021,-0.004 18.021,44.996

## Text inside footprints (layer, text, board x,y; h text height)
P3: Top Overlay "6" at 13.678,3.899 h1.27; Top Overlay "5" at 13.691,1.359 h1.27; Top Overlay "2" at 4.42,3.899 h1.27; Top Overlay "1" at 4.928,1.359 h1.27